# Altium PCB PCB1.PcbDoc
Units mm, origin at the board's own origin, x right, y up, seen from the top; angles counter-clockwise.
Board outline 208.9 x 118.98 mm, 2 copper layers (Top Layer, Bottom Layer); 105 components, 65 nets, 338 pads, 41 vias.
Unrouted connection lines stored in the file: 29.
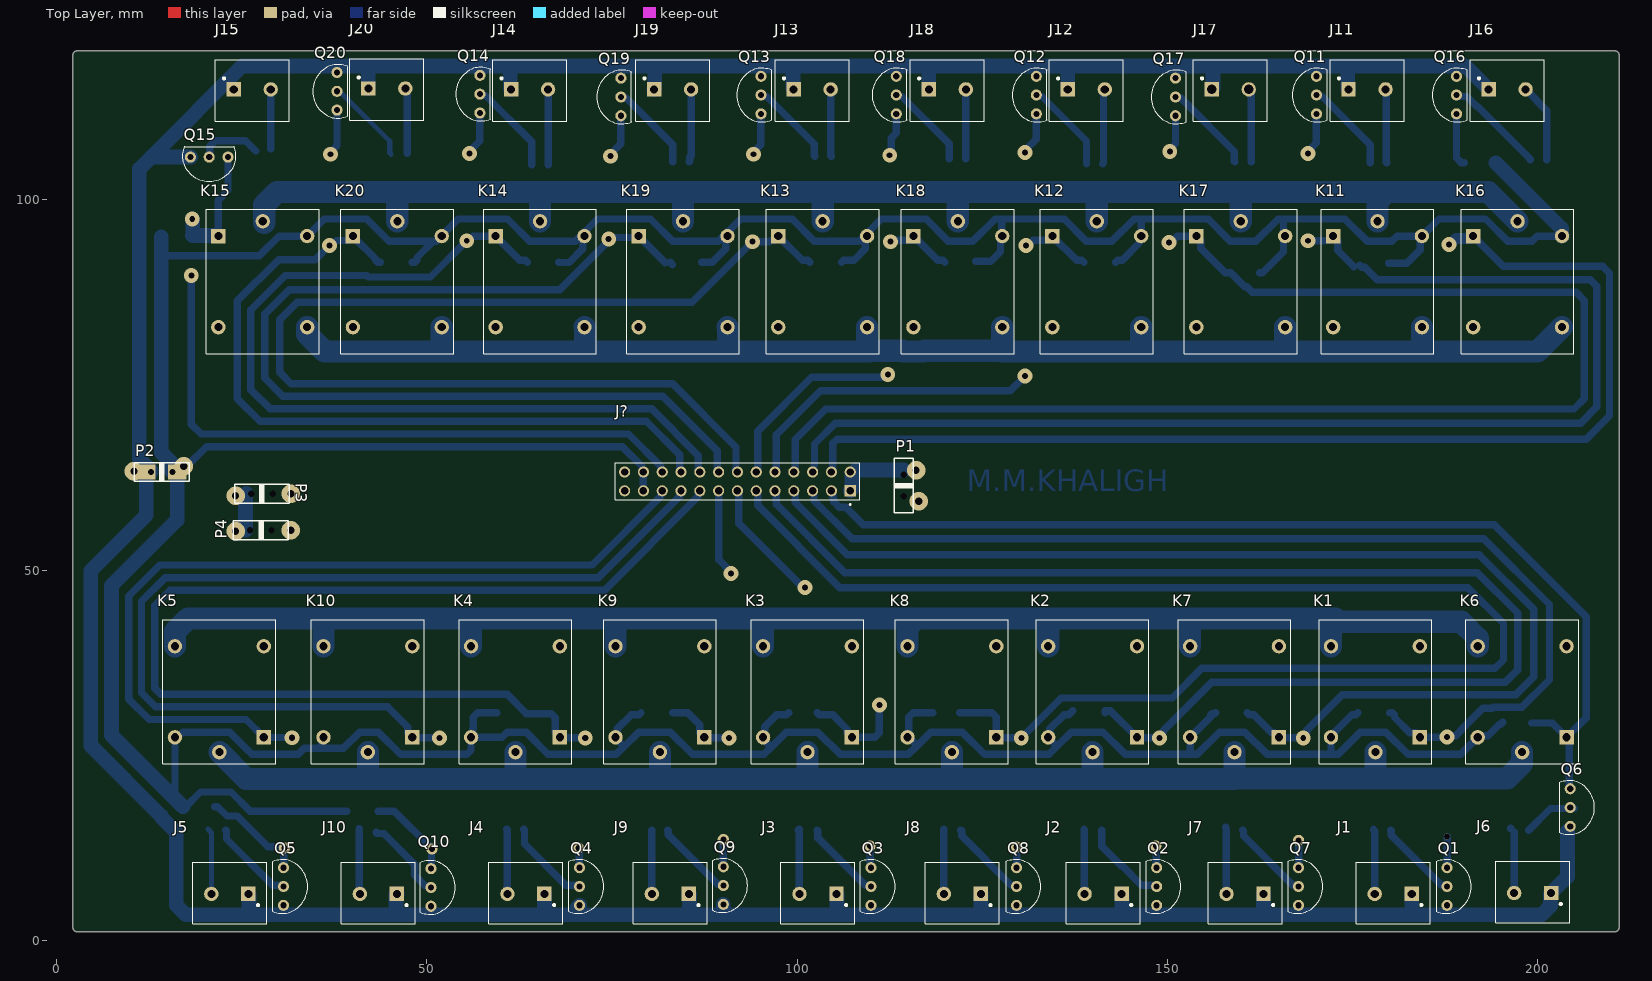
[diagram p0: Top Layer view]
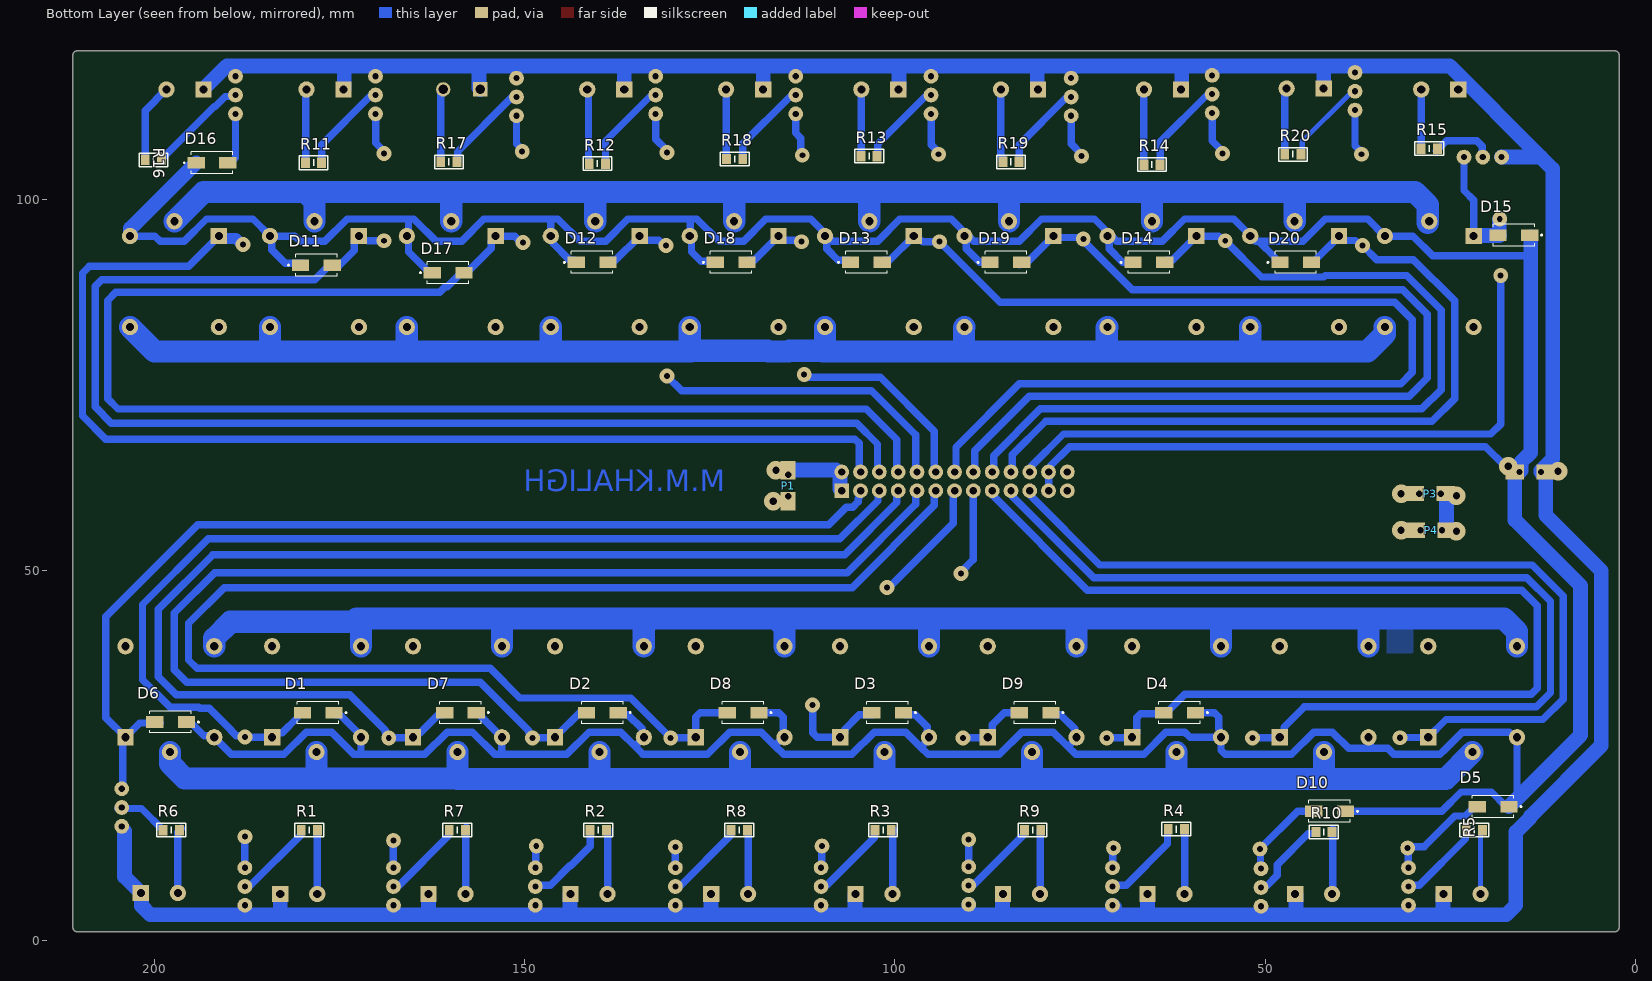
[diagram p1: Bottom Layer view, seen from below]
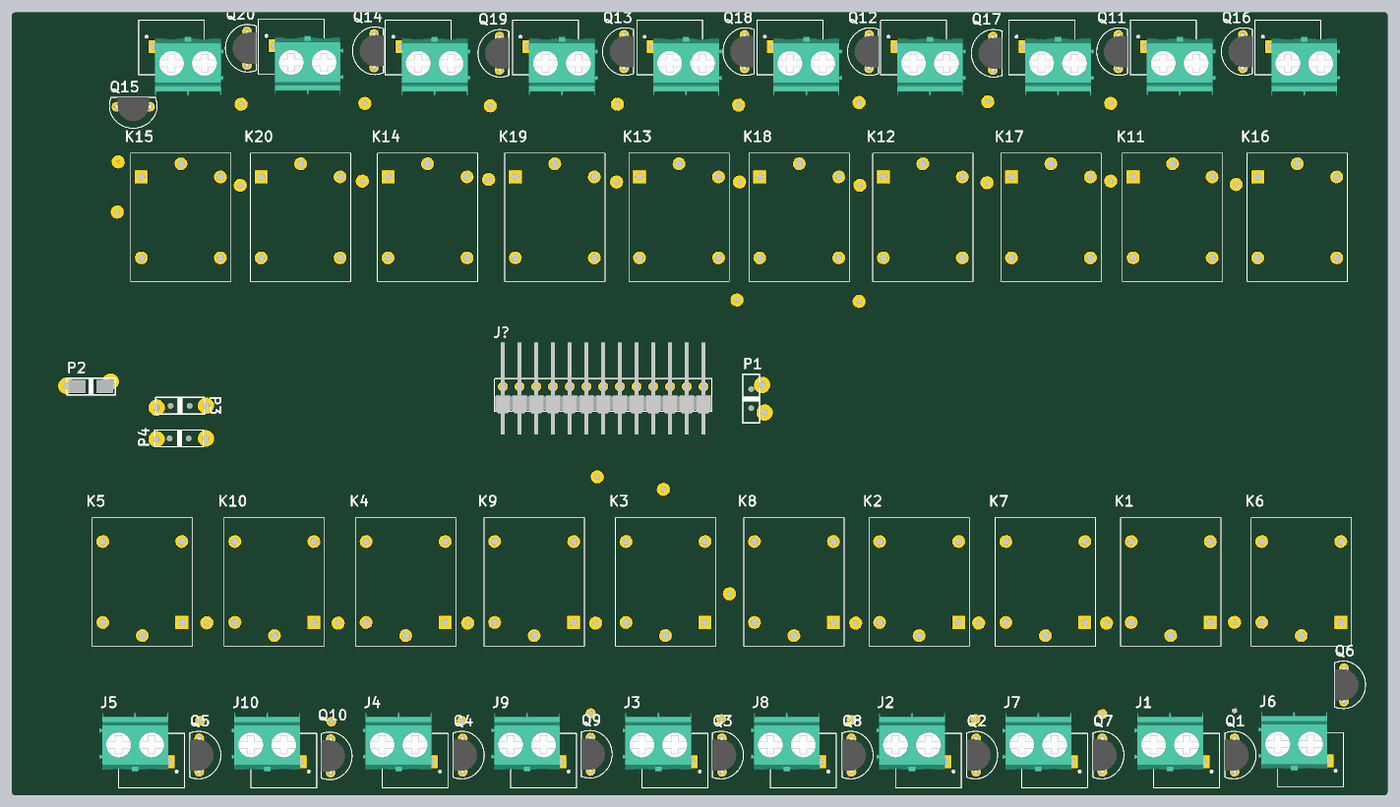
[diagram p2: 3D render of the assembled board from above, using the file's embedded part models]
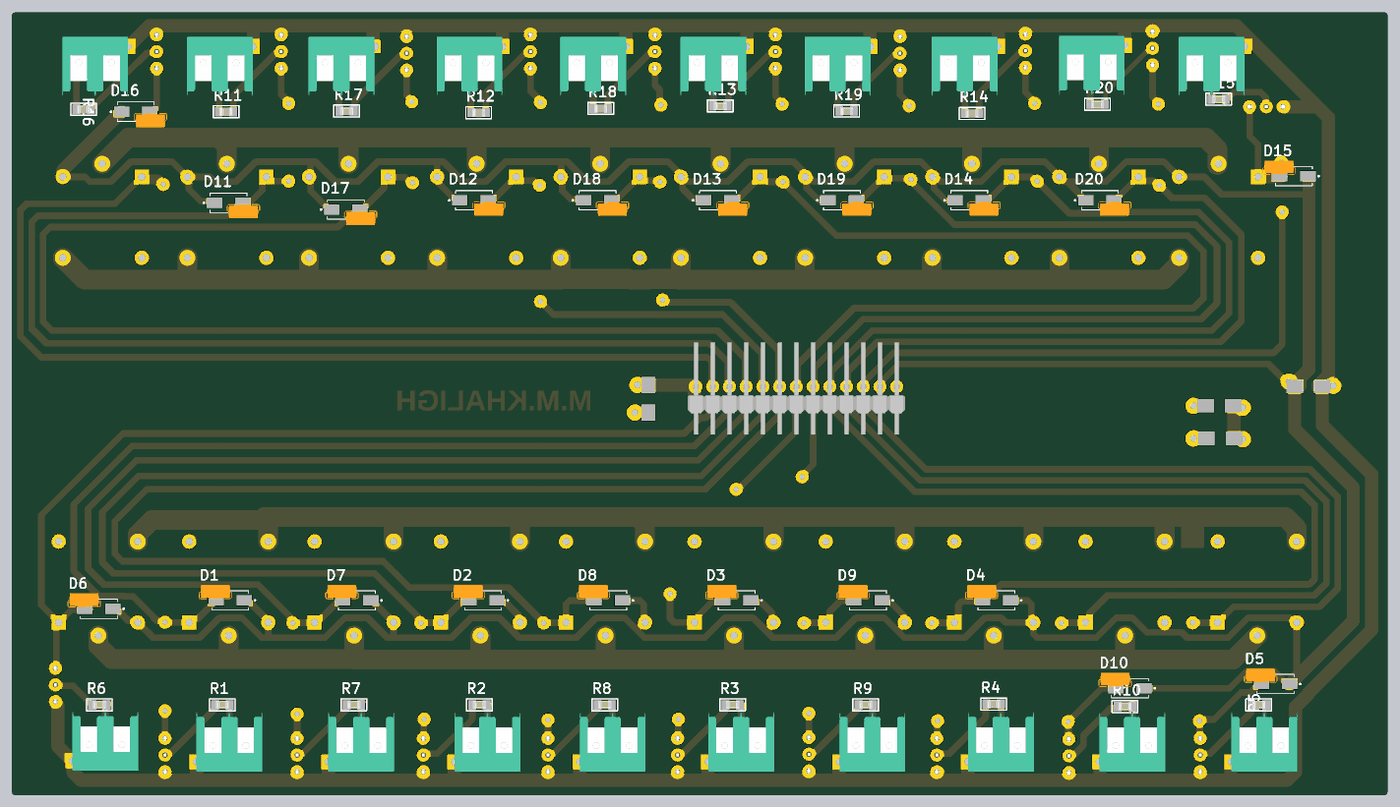
[diagram p3: 3D render of the assembled board from below, using the file's embedded part models]

## Layer stack, top to bottom
Top Solder: solder mask 0.0102, Solder Resist, Dk 3.5
Top Layer: signal copper 0.0356
Dielectric 1: dielectric 0.32, FR-4, Dk 4.8
Bottom Layer: signal copper 0.0356
Bottom Solder: solder mask 0.0102, Solder Resist, Dk 3.5

## Board outline
2.167,1.651 ccw(c2.667,1.651) 2.667,1.151 210.566,1.151 ccw(c210.566,1.651) 211.066,1.651 211.066,119.634 ccw(c210.566,119.634) 210.566,120.134 2.667,120.134 ccw(c2.667,119.634) 2.167,119.634

## Design rules (kind name [scope] priority, off if disabled: settings)
Clearance Clearance_2 [All] p1: gap=0.7 ignorepadtopadclearanceinfootprint=FALSE
Clearance Clearance_1 [All] p2: gap=0.711 ignorepadtopadclearanceinfootprint=TRUE
Clearance [All] p3: gap=0.254 ignorepadtopadclearanceinfootprint=TRUE
DiffPairsRouting [All] p1: maxlimit=1.27 minlimit=0.508 mostfreqgap=1.016 toplayer_minwidth=0.635 toplayer_maxwidth=1.27 toplayer_prefwidth=1.016 bottomlayer_minwidth=0.635 bottomlayer_maxwidth=1.27 bottomlayer_prefwidth=1.016 maxuncoupledlength=12.7
PolygonConnect [All] p1: connectstyle=Relief reliefconductorwidth=0.254 reliefentries=4 polygonreliefangle="90 Angle" airgapwidth=0.254
RoutingVias [All] p1: holewidth=0.8 width=2 viastyle="Through Hole" minholewidth=0.8 minwidth=2 maxholewidth=0.8 maxwidth=2
SolderMaskExpansion [All] p1: expansion=0.102 istentingtop=FALSE
UnpouredPolygon [All] p1: allowshelved=TRUE
Width [All] p1: maxlimit=3 minlimit=0.7 preferedwidth=1 minimp=50.000000 maximp=50.000000 favimp=50.000000
28 further rules are at their usual default settings.

## Components (designator, comment, footprint, x,y, rotation, side; value= is the part's Value field where it differs from the comment)
D1 "S1M" DIOM5227X270N 177.927,30.734 r0 bottom
D2 "S1M" DIOM5227X270N 139.523,30.734 r0 bottom
D3 "S1M" DIOM5227X270N 101.002,30.734 r0 bottom
D4 "S1M" DIOM5227X270N 61.545,30.734 r0 bottom
D5 "S1M" DIOM5227X270N 19.177,18.034 r0 bottom
D6 "S1M" DIOM5227X270N 197.866,29.464 r0 bottom
D7 "S1M" DIOM5227X270N 158.7,30.734 r0 bottom
D8 "S1M" DIOM5227X270N 120.513,30.734 r0 bottom
D9 "S1M" DIOM5227X270N 81.063,30.734 r0 bottom
D10 "S1M" DIOM5227X270N 41.275,17.399 r0 bottom
D11 "S1M" DIOM5227X270N 178.181,91.186 r180 bottom
D12 "S1M" DIOM5227X270N 140.911,91.567 r180 bottom
D13 "S1M" DIOM5227X270N 103.874,91.567 r180 bottom
D14 "S1M" DIOM5227X270N 65.687,91.567 r180 bottom
D15 "S1M" DIOM5227X270N 16.383,95.25 r0 bottom
D16 "S1M" DIOM5227X270N 192.278,105.029 r180 bottom
D17 "S1M" DIOM5227X270N 160.364,90.17 r180 bottom
D18 "S1M" DIOM5227X270N 122.137,91.567 r180 bottom
D19 "S1M" DIOM5227X270N 85.013,91.567 r180 bottom
D20 "S1M" DIOM5227X270N 45.847,91.567 r180 bottom
J1 "terminal" PHOENIX_1935161#1 180.554,6.231 r180 top
J2 "terminal" PHOENIX_1935161#1 141.351,6.231 r180 top
J3 "terminal" PHOENIX_1935161#1 102.83,6.231 r180 top
J4 "terminal" PHOENIX_1935161#1 63.373,6.231 r180 top
J5 "terminal" PHOENIX_1935161#1 23.368,6.231 r180 top
J6 "terminal" PHOENIX_1935161#1 199.39,6.358 r180 top
J7 "terminal" PHOENIX_1935161#1 160.528,6.231 r180 top
J8 "terminal" PHOENIX_1935161#1 122.341,6.231 r180 top
J9 "terminal" PHOENIX_1935161#1 82.891,6.231 r180 top
J10 "terminal" PHOENIX_1935161#1 43.434,6.231 r180 top
J11 "terminal" PHOENIX_1935161#1 177.015,114.935 r0 top
J12 "terminal" PHOENIX_1935161#1 139.082,114.935 r0 top
J13 "terminal" PHOENIX_1935161#1 102.045,114.935 r0 top
J14 "terminal" PHOENIX_1935161#1 63.858,114.935 r0 top
J15 "terminal" PHOENIX_1935161#1 26.393,114.935 r0 top
J16 "terminal" PHOENIX_1935161#1 195.938,114.935 r0 top
J17 "terminal" PHOENIX_1935161#2 158.536,114.935 r0 top
J18 "terminal" PHOENIX_1935161#1 120.309,114.935 r0 top
J19 "terminal" PHOENIX_1935161#1 83.185,114.935 r0 top
J20 "terminal" PHOENIX_1935161#1 44.577,115.062 r0 top
J? "1-826658-3" TE_1-826658-3 91.948,61.976 r180 top
K1 "JQC-3F-_T73_-1Z-12VDC" JQC3FT731Z12VDC#1 184.15,27.4 r90 top
K2 "JQC-3F-_T73_-1Z-12VDC" JQC3FT731Z12VDC#1 145.933,27.4 r90 top
K3 "JQC-3F-_T73_-1Z-12VDC" JQC3FT731Z12VDC#1 107.412,27.4 r90 top
K4 "JQC-3F-_T73_-1Z-12VDC" JQC3FT731Z12VDC#1 67.955,27.4 r90 top
K5 "JQC-3F-_T73_-1Z-12VDC" JQC3FT731Z12VDC#1 27.95,27.4 r90 top
K6 "JQC-3F-_T73_-1Z-12VDC" JQC3FT731Z12VDC#1 203.972,27.4 r90 top
K7 "JQC-3F-_T73_-1Z-12VDC" JQC3FT731Z12VDC#1 165.11,27.4 r90 top
K8 "JQC-3F-_T73_-1Z-12VDC" JQC3FT731Z12VDC#1 126.923,27.4 r90 top
K9 "JQC-3F-_T73_-1Z-12VDC" JQC3FT731Z12VDC#1 87.473,27.4 r90 top
K10 "JQC-3F-_T73_-1Z-12VDC" JQC3FT731Z12VDC#2 48.016,27.4 r90 top
K11 "JQC-3F-_T73_-1Z-12VDC" JQC3FT731Z12VDC#2 172.434,95.123 r270 top
K12 "JQC-3F-_T73_-1Z-12VDC" JQC3FT731Z12VDC#1 134.501,95.123 r270 top
K13 "JQC-3F-_T73_-1Z-12VDC" JQC3FT731Z12VDC#1 97.464,95.123 r270 top
K14 "JQC-3F-_T73_-1Z-12VDC" JQC3FT731Z12VDC#1 59.277,95.123 r270 top
K15 "JQC-3F-_T73_-1Z-12VDC" JQC3FT731Z12VDC#1 21.812,95.123 r270 top
K16 "JQC-3F-_T73_-1Z-12VDC" JQC3FT731Z12VDC#1 191.357,95.123 r270 top
K17 "JQC-3F-_T73_-1Z-12VDC" JQC3FT731Z12VDC#1 153.954,95.123 r270 top
K18 "JQC-3F-_T73_-1Z-12VDC" JQC3FT731Z12VDC#1 115.727,95.123 r270 top
K19 "JQC-3F-_T73_-1Z-12VDC" JQC3FT731Z12VDC#1 78.603,95.123 r270 top
K20 "JQC-3F-_T73_-1Z-12VDC" JQC3FT731Z12VDC#1 39.995,95.123 r270 top
P1 "24v" "HDR1X2_SMD - THD"#1 114.427,61.404 r90 top
P2 "24v" "HDR1X2_SMD - THD"#2 14.16,63.246 r0 top
P3 "AC 220" "HDR1X2_SMD - THD"#3 27.686,60.325 r0 top
P4 "BUZZER" "HDR1X2_SMD - THD"#4 27.559,55.372 r180 top
Q1 "BC547" TO92 187.833,7.239 r270 top
Q2 "BC547" TO92 148.59,7.239 r270 top
Q3 "BC547" TO92 109.982,7.239 r270 top
Q4 "BC547" TO92 70.612,7.239 r270 top
Q5 "BC547" TO92 30.607,7.239 r270 top
Q6 "BC547" TO92 204.47,17.907 r270 top
Q7 "BC547" TO92 167.767,7.239 r270 top
Q8 "BC547" TO92 129.667,7.239 r270 top
Q9 "BC547" TO92 90.043,7.366 r270 top
Q10 "BC547" TO92 50.546,7.112 r270 top
Q11 "BC547" TO92 170.18,114.173 r90 top
Q12 "BC547" TO92 132.334,114.173 r90 top
Q13 "BC547" TO92 95.123,114.173 r90 top
Q14 "BC547" TO92 57.15,114.3 r90 top
Q15 "BC547" TO92 20.574,105.791 r180 top
Q16 "BC547" TO92 189.103,114.173 r90 top
Q17 "BC547" TO92 151.13,113.919 r90 top
Q18 "BC547" TO92 113.411,114.173 r90 top
Q19 "BC547" TO92 76.2,113.919 r90 top
Q20 "BC547" TO92 37.846,114.681 r90 top
R1 "1k" "0805 - CAP - duplicate" 179.113,14.859 r180 bottom value=10k
R2 "1k" "0805 - CAP - duplicate" 140.081,14.859 r180 bottom value=10k
R3 "1k" "0805 - CAP - duplicate" 101.6,14.859 r180 bottom value=10k
R4 "1k" "0805 - CAP - duplicate" 61.976,14.986 r180 bottom value=10k
R5 "1k" "0805 - CAP - duplicate" 21.717,14.859 r180 bottom value=10k
R6 "1k" "0805 - CAP - duplicate" 197.782,14.859 r180 bottom value=10k
R7 "1k" "0805 - CAP - duplicate" 159.131,14.859 r180 bottom value=10k
R8 "1k" "0805 - CAP - duplicate" 121.031,14.859 r180 bottom value=10k
R9 "1k" "0805 - CAP - duplicate" 81.407,14.859 r180 bottom value=10k
R10 "1k" "0805 - CAP - duplicate" 42.037,14.605 r180 bottom value=10k
R11 "1k" "0805 - CAP - duplicate" 178.562,105.029 r0 bottom value=10k
R12 "1k" "0805 - CAP - duplicate" 140.208,104.902 r0 bottom value=10k
R13 "1k" "0805 - CAP - duplicate" 103.505,105.918 r0 bottom value=10k
R14 "1k" "0805 - CAP - duplicate" 65.278,104.775 r0 bottom value=10k
R15 "1k" "0805 - CAP - duplicate" 27.813,106.934 r0 bottom value=10k
R16 "1k" "0805 - CAP - duplicate" 200.195,105.41 r0 bottom value=10k
R17 "1k" "0805 - CAP - duplicate" 160.274,105.156 r0 bottom value=10k
R18 "1k" "0805 - CAP - duplicate" 121.666,105.537 r0 bottom value=10k
R19 "1k" "0805 - CAP - duplicate" 84.328,105.156 r0 bottom value=10k
R20 "1k" "0805 - CAP - duplicate" 46.228,106.172 r0 bottom value=10k

## Footprints (in the part's own frame and the unit in brackets; to place one, negate y for a bottom-side part, rotate by r counter-clockwise, add the part's x,y. Pads: shape width x height; smd on the part's side, far side on the other; paste and mask are expansions set on the pad)
"0805 - CAP - duplicate" [mm]
  rect 1.2x1.4 smd: 1(-1.1,0) 2(1.1,0)
  silkscreen extent -1.96,-0.91 1.93,0.91, body extent -1.01,-0.6 0.99,0.65, height 0.3
DIOM5227X270N [mm]
  rect 2.33x1.56 smd: A(2.14,0) C(-2.14,0)
  silkscreen extent -3.85,-1.47 2.8,1.47, body extent -0.28,-2.37 4.77,-0.2, height 2.45
"HDR1X2_SMD - THD"#1 [mil]
  rect 98.43x80 smd far side: 1(-82.5,0) 1(-82.5,0) 2(82.5,0) 2(82.5,0)
  round 0 hole 33.46: 1(-56.5,0) 2(57.51,0)
  silkscreen extent -145,-51 146,51
"HDR1X2_SMD - THD"#2 [mil]
  rect 98.43x80 smd far side: 1(-82.5,0) 2(82.5,0)
  rect 98.43x80 smd: 1(-82.5,0) 2(82.5,0)
  round 0 hole 33.46: 1(-56.5,0) 2(57.51,0)
  silkscreen extent -145,-51 146,51
"HDR1X2_SMD - THD"#3 [mil]
  rect 98.43x80 smd far side: 1(-82.5,0)
  rect 0x80 smd far side: 1(-82.5,0)
  round 0 hole 33.46: 1(-56.5,0)
  oval 0x86.61 hole 33.46 paste+0: 2(57.51,0)
  rect 98.43x80 smd far side paste+0: 2(82.5,0) 2(82.5,0)
  silkscreen extent -145,-51 146,51
"HDR1X2_SMD - THD"#4 [mil]
  rect 98.43x80 smd far side: 1(-82.5,0) 2(82.5,0) 2(82.5,0) ""(-82.5,0)
  round 0 hole 33.46: 2(57.51,0) ""(-56.5,0)
  silkscreen extent -145,-51 146,51
JQC3FT731Z12VDC#1 [mm]
  rect 1.95x1.95 / inner rect 1.95x1.95 / far side rect 2.2x2.2 hole 1.1 unplated: 1(0,0)
  round 1.95 / inner round 1.95 / far side round 2.2 hole 1.1 unplated: 2(12.3,0) 4(0,12) 5(-2,6)
  round 1.95 / inner round 1.95 / far side round 2.2 hole 1.1 unplated paste+0.762: 3(12.3,12)
  silkscreen extent -3.6,-1.62 15.9,13.62
JQC3FT731Z12VDC#2 [mm]
  rect 1.95x1.95 / inner rect 1.95x1.95 / far side rect 2.2x2.2 hole 1.1 unplated: 1(0,0)
  round 1.95 / inner round 1.95 / far side round 2.2 hole 1.1 unplated: 2(12.3,0) 3(12.3,12) 4(0,12) 5(-2,6)
  silkscreen extent -3.6,-1.62 15.9,13.62
PHOENIX_1935161#1 [mm]
  rect 1.95x1.95 / inner rect 1.95x1.95 / far side rect 2.2x2.2 hole 1.1 unplated: 1(-2.5,0)
  round 1.95 / inner round 1.95 / far side round 2.2 hole 1.1 unplated: 2(2.5,0)
  silkscreen extent -5,-4.3 5,4, body extent -2.5,-7.5 7.9,1.5, height 5.7
PHOENIX_1935161#2 [mm]
  rect 1.95x1.95 / inner round 1.95 / far side rect 1.95x1.95 hole 1.3: 1(-2.5,0)
  round 1.95 hole 1.3: 2(2.5,0)
  silkscreen extent -5,-4.3 5,4, body extent -2.5,-7.5 7.9,1.5, height 5.7
TE_1-826658-3 [mm]
  rect 1.508x1.508 / inner rect 1.508x1.508 / far side rect 2x2 hole 1: 1(-15.24,1.27)
  round 1.508 / inner round 1.508 / far side round 2 hole 1: 2(-12.7,1.27) 3(-10.16,1.27) 4(-7.62,1.27) 5(-5.08,1.27) 6(-2.54,1.27) 7(0,1.27) 8(2.54,1.27) 9(5.08,1.27) 10(7.62,1.27) 11(10.16,1.27) 12(12.7,1.27) 13(15.24,1.27) 14(-15.24,-1.27) 15(-12.7,-1.27) 16(-10.16,-1.27) 17(-7.62,-1.27) 18(-5.08,-1.27) 19(-2.54,-1.27) 20(0,-1.27) 21(2.54,-1.27) 22(5.08,-1.27) 23(7.62,-1.27) 24(10.16,-1.27) 25(12.7,-1.27) 26(15.24,-1.27)
  silkscreen extent -16.51,-2.5 16.51,3.2, body extent -16.51,-8 16.51,6, height 2.5
TO92 [mm]
  round 1.5 / inner round 1.5 / far side round 2 hole 0.831: 1(-2.54,0) 2(0,0) 3(2.54,0)
  silkscreen extent -3.62,-1.46 3.62,3.27, body extent -2.83,-1.43 2.83,2.19, height 8.77

## Part data
D1 D2 D3 D4 D5 D6 D7 D8 D9 D10 D11 D12 D13 D14 D15 D16 D17 D18 D19 D20: "Diode Standard 1000 V 1A Surface Mount DO-214AC (SMA)", Package="DO-214AC-2 Diotec", Availability="In Stock", Check_prices=https://www.snapeda.com/parts/S1M/Diotec/view-part/?ref=eda, MF="Diotec Semiconductor", MP=S1M, Price=None, Purchase-URL=https://pricing.snapeda.com/search/part/S1M/?ref=eda, SnapEDA_Link=https://www.snapeda.com/parts/S1M/Diotec/view-part/?ref=snap
J1 J2 J3 J4 J5 J6 J7 J8 J9 J10 J11 J12 J13 J14 J15 J16 J17 J18 J19 J20: library part TB008A-508-02BE, "Fixed Terminal Blocks screw type, 5.08 , 45 , 2 poles, CUI Blue, slotted screw, PCB mount", Manufacturer_Name="CUI Devices", Mouser Part Number=490-TB008A-508-02BE, Arrow Part Number=TB008A-508-02BE, Arrow Price/Stock=https://www.arrow.com/en/products/tb008a-508-02be/cui-devices?region=nac, Datasheet Link=https://componentsearchengine.com/Datasheets/1/TB008A-508-02BE.pdf, Geometry.Height=15.82mm, Manufacturer_Part_Number=TB008A-508-02BE, Mouser Price/Stock=https://www.mouser.co.uk/ProductDetail/CUI-Devices/TB008A-508-02BE?qs=vLWxofP3U2w5I2Hxj8y2hQ%3D%3D
J?: "AMPMODU II PIN HEADER 2X13P", Package=None, Availability=Warning, Centerline_Pitch="2.54 mm[.1 in]", Check_prices=https://www.snapeda.com/parts/1-826658-3/TE%20Connectivity%20AMP%20Connectors/view-part/1429931/?ref=eda, EU_RoHS_Compliance=Compliant, MF="TE Connectivity", MP=1-826658-3, Number_of_Positions=26, Price=None, Product_Type=Connector, SnapEDA_Link=https://www.snapeda.com/parts/1-826658-3/TE%20Connectivity%20AMP%20Connectors/view-part/1429931/?ref=snap
K1 K2 K3 K4 K5 K6 K7 K8 K9 K10 K11 K12 K13 K14 K15 K16 K17 K18 K19 K20: "RELAY POWER 10A 12VDC 1C PCB TYPE (JS1) 5PIN QIANJ", Manufacturer_Name=QIANJI, Manufacturer_Part_Number=JQC-3F-(T73)-1Z-12VDC, Datasheet Link=https://img.ozdisan.com/ETicaret_Dosya/341245_8627675.pdf, Geometry.Height=15.5mm
P1 P2 P3 P4: library part "Header 2", "Header, 2-Pin", LatestRevisionDate=17-Jul-2002, LatestRevisionNote="Re-released for DXP Platform.", Publisher="Altium Limited"
Q1 Q2 Q3 Q4 Q5 Q6 Q7 Q8 Q9 Q10 Q11 Q12 Q13 Q14 Q15 Q16 Q17 Q18 Q19 Q20: "Trans GP BJT NPN 45V 0.1A 500mW 3-Pin TO-92 T/R", Package=None, Availability="In Stock", Check_prices=https://www.snapeda.com/parts/BC547/Onsemi/view-part/?ref=eda, MF="ON Semiconductor", MP=BC547, Price=None, SnapEDA_Link=https://www.snapeda.com/parts/BC547/Onsemi/view-part/?ref=snap
R1 R2 R3 R4 R5 R6 R7 R8 R9 R10 R11 R12 R13 R14 R15 R16 R17 R18 R19 R20: library part Res1, "Resistor", LatestRevisionDate=17-Jul-2002, LatestRevisionNote="Re-released for DXP Platform.", PackageDescription="Axial Device, Thru-Hole; 2 Leads; 0.3 in Pin Spacing", PackageReference=AXIAL-0.3, Published=8-Jun-2000, Publisher="Altium Limited"

## Free pads (board coordinates)
  round 1.524 / inner round 1.524 / far side round 2 hole 0.8: 2(167.767,13.462) 4(148.463,12.7) 5(129.667,12.573) 6(109.855,12.7) 7(90.043,13.589) 8(70.485,12.446) 9(50.673,12.319) 10(30.734,12.446)

## Via types
v1: diameter 2, hole 0.8, Top Layer to Bottom Layer, 28 vias
v2: diameter 2.5, hole 1, Top Layer to Bottom Layer, 8 vias
v3: diameter 2, hole 0.85, Top Layer to Bottom Layer, 4 vias
v4: diameter 0.8/2 (per signal layer), hole 0.8, Top Layer to Bottom Layer, 1 vias

## Nets (pads, with @x,y where several pads share a name; then routed paths per layer and width w, separated by ;. In a path a pad name is that pad's centre, name@x,y a point inside that pad or via, vN(x,y) a via of type N, cw(c..) or ccw(c..) an arc to the next point about the centre after c; other vN are vias at no path point)
1: D1.A J?.3 K1.1 Q1.1 | length 147.4
  Bottom Layer w1: J?.3 102.299,60.515 102.299,59.372 107.442,54.229 192.786,54.229 201.672,45.343 201.672,35.175 197.941,31.444 194.064,31.444 193.969,31.349 192.668,31.349 189.672,28.353 189.672,28.3 188.995,27.623 188.024,27.623 v1(187.833,27.432) 187.817,27.416 184.166,27.416 K1.1 183.55,28 182.801,28 180.732,30.069 180.732,30.454 180.452,30.734 D1.A ; Q1.1 v4(187.833,13.97)
2: D2.A J?.5 K2.1 pad.4 Q2.1 | length 180.4
  Bottom Layer w1: J?.5 97.219,60.515 97.219,58.864 106.426,49.657 191.897,49.657 197.358,44.196 197.358,36.536 195.669,34.847 156.015,34.847 149.471,28.303 149.471,28.076 148.971,27.576 v1(148.971,27.305) 148.924,27.352 145.98,27.352 K2.1 142.328,31.005 141.663,31.005 D2.A ; pad.4 148.526,12.636 148.526,9.842 Q2.1
3: D3.A J?.7 K3.1 pad.6 Q3.1 | length 34
  Bottom Layer w1: J?.7 92.139,60.515 92.139,56.324 100.838,47.625 v1(101.092,47.625) ; D3.A@102.743,30.734 103.023,30.454 104.801,30.454 106.812,28.443 106.812,28 K3.1 107.428,27.416 110.539,27.416 111.125,28.002 v1(111.125,31.75) ; pad.6 109.918,12.636 109.918,9.842 Q3.1
4: D4.A J?.9 K4.1 pad.8 Q4.1 | length 156.4
  Bottom Layer w1: pad.8 70.549,12.383 70.549,9.842 Q4.1 ; v3(71.374,27.305) 71.327,27.352 68.002,27.352 67.355,28 67.355,30.021 66.769,30.607 63.427,30.607 60.834,33.2 14.035,33.2 13.208,34.027 13.208,45.157 15.324,47.273 74.006,47.273 86.677,59.943 86.677,60.515 J?.9
5: D5.A J?.11 K5.1 pad.10 Q5.1 | length 130.9
  Bottom Layer w1: D5.A 21.702,18.034 22.977,16.759 24.368,16.759 28.49,12.637 30.543,12.637 pad.10 30.67,12.383 30.67,9.842 Q5.1 ; v3(31.75,27.346) 31.723,27.373 28.023,27.373 28,27.35 25.55,29.8 12.491,29.8 9.731,32.56 9.731,46.489 13.915,50.673 72.326,50.673 81.597,59.943 81.597,60.515 J?.11
6: D6.A J?.2 K6.1 Q6.1 | length 139.9
  Bottom Layer w1: J?.2 104.839,60.515 104.839,59.808 104.988,59.659 104.988,59.209 105.691,58.506 106.594,58.506 108.966,56.134 194.183,56.134 206.629,43.688 206.629,30.057 K6.1 ; D6.A@199.28,29.337 202.035,29.337 K6.1 ; Q6.1@204.587,20.33 204.343,20.574 204.343,27.029 K6.1
7: D7.A J?.4 K7.1 pad.2 Q7.1 | length 164.1
  Bottom Layer w1: J?.4 99.759,60.515 99.759,59.118 106.807,52.07 192.151,52.07 199.517,44.704 199.517,35.56 197.104,33.147 173.669,33.147 168.88,28.358 168.88,28.048 168.402,27.571 v1(168.402,27.3) 168.352,27.35 165.16,27.35 164.51,28 164.151,28 161.697,30.454 161.12,30.454 D7.A ; Q7.1 pad.2
8: D8.A J?.6 K8.1 pad.5 Q8.1 | length 198
  Bottom Layer w1: J?.6 94.679,60.515 94.679,58.737 105.791,47.625 190.627,47.625 195.453,42.799 195.453,37.846 194.31,36.703 154.686,36.703 150.697,32.714 135.721,32.714 v1@130.312,27.305 ; D8.A@121.977,30.734 126.337,30.734 126.923,30.148 K8.1 126.97,27.352 130.255,27.352 v1(130.302,27.305) ; Q8.1 pad.5
9: D9.A J?.8 K9.1 pad.7 Q9.1 | length 25.2
  Bottom Layer w1: D9.A 83.229,30.708 85.243,30.708 86.873,29.078 86.873,28 87.523,27.35 90.755,27.35 v3(90.805,27.3) ; J?.8 89.408,51.415 91.059,49.764 v1(91.059,49.53) ; Q9.1 pad.7
10: D10.A J?.10 K10.1 pad.9 Q10.1 | length 147.1
  Bottom Layer w1: D10.A 45.593,17.399 pad.9 50.609,12.255 50.609,9.716 Q10.1 ; K10.1 47.416,28 47.416,28.784 44.7,31.5 13.331,31.5 11.431,33.4 11.431,45.785 14.619,48.973 73.166,48.973 84.137,59.943 84.137,60.515 J?.10 ; K10.1@48.066,27.35 51.639,27.35 v3(51.689,27.3)
11: D11.A J?.16 K11.1 Q11.1 | length 175.9
  Bottom Layer w1: J?.16 102.299,63.437 102.299,64.144 102.362,64.207 102.362,67.032 105.18,69.85 205.867,69.85 208.075,72.058 208.075,88.317 207.186,89.206 178.406,89.206 176.706,90.906 176.321,90.906 D11.A ; v1(169.037,94.488) 171.248,94.488 171.283,94.523 171.834,94.523 K11.1 173.034,94.523 173.034,93.173 D11.A@175.204,91.003 ; v1(169.037,106.299) 169.037,106.57 170.18,107.713 Q11.1
12: D12.A J?.18 K12.1 Q12.1 | length 57.6
  Bottom Layer w1: J?.18 97.219,63.437 97.219,68.263 103.171,74.215 128.825,74.215 v1(130.81,76.2) ; v1(130.81,106.426) 130.81,106.697 132.334,108.221 Q12.1 ; v1(130.937,93.853) 131.208,93.853 131.901,94.546 133.924,94.546 K12.1 137.777,91.847 138.491,91.847 D12.A
13: D13.A J?.20 K13.1 Q13.1 | length 159.7
  Bottom Layer w1: J?.20@91.621,63.573 91.757,63.708 91.757,66.612 83.194,75.175 31.632,75.175 30.099,76.708 30.099,83.82 32.466,86.187 85.806,86.187 v1(93.98,94.361) 96.278,94.361 96.44,94.523 96.864,94.523 K13.1 100.74,91.847 101.454,91.847 D13.A ; v1(94.107,106.172) 94.107,106.443 95.123,107.459 Q13.1
14: D14.A J?.22 K14.1 Q14.1 | length 126.4
  Bottom Layer w1: v1(55.753,106.299) 55.753,106.57 57.15,107.967 Q14.1 ; D14.A 63.267,91.847 62.553,91.847 K14.1 56.278,95.123 55.643,94.488 v1(55.372,94.488) 50.471,89.587 42.045,89.587 41.843,89.789 30.861,89.789 26.211,85.139 26.211,74.373 28.809,71.775 80.362,71.775 86.677,65.461 86.677,63.437 J?.22
15: D15.A J?.24 K15.1 Q15.1 | length 103.8
  Bottom Layer w1: v1(18.161,89.789) 18.161,69.691 19.477,68.375 77.23,68.375 81.597,64.009 81.597,63.437 J?.24 ; K15.1 21.812,99.97 23.114,101.273 Q15.1
  Bottom Layer w2: v1(18.288,97.409) 18.358,97.339 18.358,95.415 D15.A@18.587,95.186 ; D15.A@18.333,95.186 21.748,95.186 K15.1
16: D16.A J?.15 K16.1 Q16.1 | length 161.2
  Bottom Layer w1: J?.15 104.839,63.437 104.839,67.105 105.425,67.691 206.629,67.691 209.775,70.837 209.775,90.121 208.837,91.059 195.421,91.059 K16.1 ; Q16.1 189.103,105.679 189.753,105.029 D16.A
  Bottom Layer w1.5: v1(188.087,93.98) 188.222,93.98 189.015,94.773 191.007,94.773 K16.1
17: D17.A J?.17 K17.1 Q17.1 | length 192.5
  Bottom Layer w1: J?.17 99.759,63.437 99.759,67.628 103.886,71.755 204.978,71.755 206.375,73.152 206.375,86.412 205.281,87.506 161.526,87.506 160.767,88.265 160.514,88.265 158.609,90.17 D17.A 157.839,90.17 154.554,93.455 154.554,94.523 K17.1 153.908,95.077 151.354,95.077 150.512,94.234 v1(150.241,94.234) ; v1(150.368,106.553) 150.368,106.824 151.13,107.586 Q17.1
18: D18.A J?.19 K18.1 Q18.1 | length 41
  Bottom Layer w1: J?.19 94.679,63.437 94.679,68.771 101.981,76.073 111.655,76.073 111.997,76.415 v1(112.268,76.415) ; v1(112.522,106.045) 112.713,106.236 112.713,108.347 113.411,109.045 Q18.1 ; v1(112.649,94.361) 112.84,94.552 116.298,94.552 119.003,91.847 119.717,91.847 D18.A
19: D19.A J?.21 K19.1 Q19.1 | length 143.4
  Bottom Layer w1: v1(74.803,105.918) 74.803,106.189 76.2,107.586 Q19.1 ; D19.A@82.208,91.518 K19.1 78.413,94.932 74.739,94.932 v1(74.549,94.742) 74.549,94.488 67.948,87.887 31.372,87.887 28.067,84.582 28.067,75.946 30.538,73.475 81.846,73.475 89.217,66.104 89.217,63.437 J?.21 ; D19.A D19.A@83.175,91.265
20: D20.A J?.23 K20.1 Q20.1 | length 109.4
  Bottom Layer w1: v1(36.957,106.172) 36.957,106.443 37.846,107.332 Q20.1 ; D20.A 43.322,91.567 43.042,91.847 43.042,92.076 K20.1 39.395,94.523 37.771,94.523 37.101,93.853 v1(36.83,93.853) 34.925,91.948 29.972,91.948 24.384,86.36 24.384,73.152 27.461,70.075 79.658,70.075 84.137,65.596 84.137,63.437 J?.23
24V: D1.C D2.C D3.C D4.C D5.C D6.C D7.C D8.C D9.C D10.C D11.C D12.C D13.C D14.C D15.C D16.C D17.C D18.C D19.C D20.C J?.1 J?.12 J?.14 J?.25 K1.4 K2.4 K3.4 K4.4 K5.4 K6.4 K7.4 K8.4 K9.4 K10.4 K11.4 K12.4 K13.4 K14.4 K15.4 K16.4 K17.4 K18.4 K19.4 K20.4 P1.2 P2.2 | length 730.7
  Bottom Layer w1: 14.097,92.456 27.344,92.456 30.011,95.123 K15.4 36.112,97.423 41.877,97.423 44.877,94.423 K20.4@51.233,94.423 ; 15.95,19.176 K5.4 16.274,27.4 16.974,28.1 23.353,28.1 25.65,25.803 26.353,25.1 32.615,25.1 33.423,25.908 35.687,25.908 ; D5.C 17.422,18.034 19.402,20.014 23.517,20.014 26.132,17.399 D10.C ; v2(17.145,64.008) 17.551,64.008 20.218,66.675 76.39,66.675 79.057,64.009 79.057,63.437 J?.25 J?.12 ; K10.4 35.786,27.17 35.786,26.322 35.687,26.223 35.687,25.908 ; D20.C 48.372,91.567 48.652,91.847 48.652,92.232 50.843,94.423 ; K20.4@51.264,94.392 K20.4 ; K20.4@51.964,95.154 54.233,97.423 60.874,97.423 63.874,94.423 70.045,94.423 73.045,97.423 80.2,97.423 83.2,94.423 89.371,94.423 92.371,97.423 99.345,97.423 102.345,94.423 108.395,94.423 111.395,97.423 117.444,97.423 120.444,94.423 123.759,94.423 126.77,97.434 127.635,97.434 ; D4.C 56.847,30.734 56.261,30.148 56.261,28.555 56.184,28.478 56.184,27.63 K4.4 ; D14.C 67.825,91.554 69.211,91.554 71.047,93.39 71.047,94.893 K14.4 ; D9.C 78.643,30.454 77.627,30.454 75.702,28.53 75.702,27.63 K9.4 75.473,27.27 76.618,26.125 ; D19.C 88.55,91.567 90.374,93.39 90.374,94.893 K19.4 ; D3.C 98.582,30.454 97.256,30.454 95.641,28.839 95.641,27.63 K3.4 95.412,27.143 96.493,26.062 ; D13.C 106.294,91.847 107.691,91.847 109.234,93.39 109.234,94.893 K13.4 ; D8.C 115.702,30.734 115.116,30.148 115.116,27.594 K8.4 115.094,27.4 116.218,26.276 ; D18.C@124.161,91.709 126.201,91.709 127.498,93.005 127.498,94.893 K18.4 127.635,95.215 127.635,97.434 ; D2.C@137.229,30.966 136.718,30.454 136.087,30.454 134.162,28.53 134.162,27.63 K2.4 133.933,27.357 135.121,26.169 ; D12.C 143.331,91.847 143.917,91.847 146.271,94.201 146.271,94.893 K12.4 146.501,97.377 146.558,97.434 ; D7.C 156.525,30.734 156.398,30.607 156.048,30.607 155.895,30.454 155.895,30.185 K7.4 153.11,25.268 153.289,25.089 ; D17.C 162.889,90.17 165.725,93.005 165.725,94.893 K17.4 165.725,95.353 165.725,97.318 165.608,97.434 ; D1.C 175.507,30.454 174.98,30.454 172.15,27.624 K1.4 172.15,25.154 172.085,25.089 ; D11.C@179.955,91.44 182.357,91.44 184.204,93.287 184.204,94.893 K11.4 ; D6.C@195.334,29.457 195.061,29.184 194.919,29.184 193.365,27.63 192.201,27.63 K6.4 189.672,25.1 182.553,25.1 179.553,28.1 176.119,28.1 173.107,25.089 172.085,25.089 ; K16.4 199.985,95.123 199.285,94.423 196.022,94.423 193.022,97.423 186.734,97.423 K11.4 ; 35.687,25.908 38.705,25.908 40.897,28.1 43.419,28.1 46.43,25.089 55.369,25.089 55.955,25.675 K4.4 ; K4.4 60.136,27.4 60.836,28.1 63.073,28.1 63.106,28.067 63.391,28.067 66.358,25.1 75.593,25.1 76.618,26.125 ; 76.618,26.125 78.593,28.1 82.876,28.1 85.876,25.1 95.532,25.1 96.493,26.062 ; 96.493,26.062 98.532,28.1 102.815,28.1 105.815,25.1 115.043,25.1 116.218,26.276 ; 116.218,26.276 118.043,28.1 122.326,28.1 125.326,25.1 134.053,25.1 135.121,26.169 ; 127.635,97.434 136.086,97.434 139.098,94.423 142.532,94.423 145.543,97.434 146.558,97.434 ; 135.121,26.169 137.053,28.1 141.336,28.1 144.347,25.089 153.289,25.089 ; 146.558,97.434 155.54,97.434 158.551,94.423 161.986,94.423 164.997,97.434 165.608,97.434 ; 153.289,25.089 154.067,25.089 157.078,28.1 160.513,28.1 163.524,25.089 172.085,25.089 ; 165.608,97.434 174.019,97.434 177.031,94.423 180.362,94.423 181.062,95.123 K11.4
  Bottom Layer w2: D15.C@14.097,95.03 14.097,92.456 14.097,65.884 15.425,64.556 15.425,63.442 P2.2@15.621,63.246 ; P2.2@16.256,63.246 16.256,56.769 7.366,47.879 7.366,27.705 D5.C ; J?.1 107.442,60.96 107.442,62.992 107.95,63.5 P1.2@114.427,63.5 ; D16.C 203.318,96.129 203.318,95.161 K16.4
  other v2: 116.078,63.5
AC: K1.5 K2.5 K3.5 K4.5 K5.5 K6.5 K7.5 K8.5 K9.5 K10.5 K11.5 K12.5 K13.5 K14.5 K15.5 K16.5 K17.5 K18.5 K19.5 K20.5 P3.2 | length 412.4
  Bottom Layer w3: K5.5 25.587,21.763 42.016,21.763 ; K15.5@28.002,96.932 28.002,99.335 29.759,101.092 45.995,101.092 65.277,101.092 84.603,101.092 103.464,101.092 ; K10.5 42.016,21.763 ; K20.5 45.995,100.986 46.101,101.092 ; K4.5 61.955,21.784 61.976,21.763 ; K14.5 65.277,100.964 65.405,101.092 ; 81.473,23.241 K9.5 ; K19.5 84.603,100.859 84.836,101.092 ; 101.412,23.241 K3.5 ; K13.5 103.464,101.092 ; 120.65,21.763 61.976,21.763 ; K8.5 120.923,21.763 139.933,21.763 ; 121.539,101.092 121.727,100.904 K18.5 ; K2.5 139.933,21.763 ; K12.5 140.501,101.092 ; 159.11,21.844 178.15,21.844 ; K7.5 159.11,21.763 139.933,21.763 ; K17.5 159.954,101.092 ; K1.5 178.15,21.844 ; K11.5 178.434,99.872 179.654,101.092 ; K16.5 193.388,101.092 179.654,101.092 ; K6.5 197.972,23.855 195.96,21.844 178.15,21.844 ; 42.016,21.763 61.976,21.763 ; 103.464,101.092 121.727,101.092 140.501,101.092 ; 140.501,101.092 159.954,101.092 ; 159.954,101.092 178.434,101.092 179.654,101.092
  other v2: 31.623,60.325
BUZZER: K1.3 K2.3 K3.3 K4.3 K5.3 K6.3 K7.3 K8.3 K9.3 K10.3 K11.3 K12.3 K13.3 K14.3 K15.3 K16.3 K17.3 K18.3 K19.3 K20.3 P4.1 P4.@29.654,55.372 | length 412
  Bottom Layer w3: K5.3 15.95,41.677 17.707,43.434 55.955,43.434 ; K15.3 33.812,81.885 36.174,79.523 51.995,79.523 ; K10.3 36.016,43.382 36.068,43.434 ; K20.3 51.995,79.523 ; K4.3 55.955,43.434 ; K14.3 71.374,82.726 71.374,79.523 ; K9.3 75.473,42.834 76.073,43.434 ; K19.3 90.678,82.748 90.678,79.523 ; K3.3 95.412,43.272 95.25,43.434 ; K13.3 109.464,79.787 109.728,79.523 90.678,79.523 ; 109.636,79.615 114.268,79.615 114.36,79.523 117.094,79.523 117.186,79.615 127.727,79.615 ; K8.3 114.923,42.279 116.078,43.434 ; K18.3 127.727,79.615 ; K2.3 133.933,42.47 132.969,43.434 ; K12.3 146.501,79.58 146.558,79.523 ; K7.3 153.11,43.105 152.781,43.434 ; K17.3 165.954,79.812 166.243,79.523 ; K1.3 172.15,42.864 172.72,43.434 ; 172.15,43.434 152.781,43.434 ; 172.286,43 189.759,43 191.972,40.788 K6.3 ; K11.3 184.434,79.747 184.658,79.523 ; K16.3 200.057,79.523 184.658,79.523 ; 51.995,79.523 71.374,79.523 ; 55.955,43.434 95.25,43.434 ; 71.374,79.523 90.678,79.523 ; 95.25,43.434 116.078,43.434 ; 116.078,43.434 132.969,43.434 ; 127.727,79.615 127.635,79.523 146.558,79.523 ; 132.969,43.434 152.781,43.434 ; 146.558,79.523 166.243,79.523 ; 166.243,79.523 184.658,79.523
  other v2: 31.623,55.372
GND: J1.1 J2.1 J3.1 J4.1 J5.1 J6.1 J7.1 J8.1 J9.1 J10.1 J11.1 J12.1 J13.1 J14.1 J15.1 J16.1 J17.1 J18.1 J19.1 J20.1 P1.1 P2.1 Q1.3 Q2.3 Q3.3 Q4.3 Q5.3 Q6.3 Q7.3 Q8.3 Q9.3 Q10.3 Q11.3 Q12.3 Q13.3 Q14.3 Q15.3 Q16.3 Q17.3 Q18.3 Q19.3 Q20.3 | length 552.2
  Bottom Layer w2: P2.1@12.725,63.246 12.065,62.586 12.065,57.404 4.572,49.911 4.572,26.289 14.172,16.689 14.172,16.55 16.129,14.593 16.129,4.699 17.399,3.429 26.035,3.429 ; P2.1@12.725,63.437 11.124,65.039 11.124,104.169 12.746,105.791 ; Q15.3 12.746,105.791 ; J5.1 25.968,6.131 25.968,3.496 26.035,3.429 ; J20.1 42.077,118.023 42.164,118.11 ; J10.1 45.834,6.131 45.834,4.053 45.212,3.431 ; J14.1 61.258,115.035 61.258,117.558 60.706,118.11 ; J4.1 65.873,3.431 ; Q4.3@70.358,4.445 Q4.3 ; J19.1 80.785,115.035 80.785,117.996 80.899,118.11 ; J9.1 85.471,6.151 85.471,3.556 ; Q9.3@90.043,4.572 Q9.3 ; J13.1 99.445,115.035 99.445,117.725 99.06,118.11 ; J3.1 105.381,6.181 105.381,3.839 105.618,3.602 ; J18.1 117.809,117.936 117.983,118.11 ; 124.841,3.556 J8.1 ; J12.1 136.582,118.04 136.652,118.11 ; J2.1 143.891,6.191 143.891,3.556 ; J17.1 156.21,115.109 156.21,118.11 ; 163.028,3.858 J7.1 ; J11.1 174.415,115.035 174.415,117.685 173.99,118.11 ; J1.1 183.054,3.431 ; J16.1 190.263,118.11 173.99,118.11 ; Q6.3@204.089,14.732 204.089,8.557 201.79,6.258 201.79,4.603 200.618,3.431 187.833,3.431 183.054,3.431 ; 12.746,105.791 25.065,118.11 42.164,118.11 ; 26.035,3.429 32.893,3.429 32.895,3.431 45.212,3.431 ; 42.164,118.11 60.706,118.11 ; 45.212,3.431 65.873,3.431 ; 60.706,118.11 80.899,118.11 ; 65.873,3.431 85.471,3.431 90.043,3.431 105.33,3.431 109.982,3.431 143.891,3.431 148.59,3.431 163.028,3.431 167.767,3.431 183.054,3.431 ; 80.899,118.11 99.06,118.11 ; 99.06,118.11 117.983,118.11 ; 117.983,118.11 136.652,118.11 ; 136.652,118.11 156.21,118.11 ; 156.21,118.11 173.99,118.11
  other v2: 116.459,59.309 10.414,63.373
NetJ1_2: J1.2 R1.2 | length 8.8
  Bottom Layer w1: R1.2@177.884,14.986 177.884,14.886 178.054,14.716 J1.2
NetJ2_2: J2.2 R2.2 | length 8.8
  Bottom Layer w1: R2.2@138.768,14.986 138.81,14.945 138.81,6.273 J2.2
NetJ3_2: J3.2 R3.2 | length 8.8
  Bottom Layer w1: R3.2@100.16,14.859 R3.2@100.182,14.838 ; R3.2@100.309,14.965 100.309,6.253 J3.2
NetJ4_2: J4.2 R4.2 | length 8.8
  Bottom Layer w1: R4.2@60.79,14.986 60.832,14.945 60.832,6.273 J4.2
NetJ5_2: J5.2 R5.2 | length 9
  Bottom Layer w0.7: R5.2@20.404,14.986 R5.2@20.617,14.773 ; R5.2 R5.2@20.617,14.773 ; J5.2 20.868,14.508 20.617,14.759 R5.2@20.617,14.773
NetJ6_2: J6.2 R6.2 | length 8.3
  Bottom Layer w1: R6.2@196.426,15.013 R6.2@196.426,15.113 ; J6.2 R6.2@196.89,14.549
NetJ7_2: J7.2 R7.2 | length 8.8
  Bottom Layer w1: R7.2@157.902,15.24 R7.2@157.944,15.199 ; R7.2@157.987,14.945 157.987,6.273 J7.2
NetJ8_2: J8.2 R8.2 | length 8.8
  Bottom Layer w1: J8.2 119.843,6.233 119.843,14.984 R8.2@119.845,14.986
NetJ9_2: J9.2 R9.2 | length 8.6
  Bottom Layer w1: R9.2@80.348,14.859 80.369,14.837 80.369,6.253 J9.2
NetJ10_2: J10.2 R10.2 | length 8.7
  Bottom Layer w1: R10.2@40.871,14.351 40.871,6.294 J10.2 ; R10.2@40.871,14.478 R10.2@40.871,15.05
NetJ11_2: J11.2 R11.2 | length 10
  Bottom Layer w1: J11.2 179.589,114.862 179.589,105.102 R11.2
NetJ12_2: J12.2 R12.2 | length 10.1
  Bottom Layer w1: R12.2 141.408,105.002 141.408,114.761 J12.2
NetJ13_2: J13.2 R13.2 | length 9
  Bottom Layer w1: J13.2 104.575,114.905 104.575,105.948 R13.2
NetJ14_2: J14.2 R14.2 | length 10.2
  Bottom Layer w1: J14.2 66.368,114.925 66.368,104.785 R14.2
NetJ15_2: J15.2 R15.2 | length 8
  Bottom Layer w1: J15.2 28.893,106.934 R15.2@28.916,106.911
NetJ16_2: J16.2 R16.2 | length 10.7
  Bottom Layer w1: J16.2 201.295,112.078 R16.2
NetJ17_2: J17.2 R17.2 | length 9.9
  Bottom Layer w1: J17.2 161.036,114.678 161.374,114.34 R17.2
NetJ18_2: J18.2 R18.2 | length 9.4
  Bottom Layer w1: R18.2 122.788,105.558 122.788,114.913 J18.2
NetJ19_2: J19.2 R19.2 | length 9.9
  Bottom Layer w1: R19.2 85.528,105.256 85.528,105.785 85.685,105.942 J19.2
NetJ20_2: J20.2 R20.2 | length 8.9
  Bottom Layer w1: J20.2 47.077,114.737 47.328,114.486 R20.2@47.328,106.272
NetP3_1: P3.1 P4.2 | length 5
  Bottom Layer w2: P4.2@25.463,55.372 25.463,60.198 P3.1@25.59,60.325
  other v2: 24.13,55.245 24.132,60.058
NetQ1_2: Q1.2 R1.1 | length 11.1
  Bottom Layer w1: R1.1 180.313,14.759 180.313,14.188 187.07,7.43 187.642,7.43 Q1.2
NetQ2_2: Q2.2 R2.1 | length 11.9
  Bottom Layer w1: R2.1 141.181,12.659 143.795,10.045 143.935,10.045 146.549,7.43 148.399,7.43 Q2.2
NetQ3_2: Q3.2 R3.1 | length 11
  Bottom Layer w1: R3.1 102.8,14.759 102.8,13.85 109.219,7.43 109.791,7.43 Q3.2
NetQ4_2: Q4.2 R4.1 | length 11.8
  Bottom Layer w1: R4.1 63.176,14.886 63.176,13.024 68.77,7.43 70.421,7.43 Q4.2
NetQ5_2: Q5.2 R5.1 | length 11.6
  Bottom Layer w1: R5.1 22.917,14.759 22.917,13.659 29.146,7.43 30.416,7.43 Q5.2
NetQ6_2: Q6.2 R6.1 | length 7.3
  Bottom Layer w1: R6.1 201.803,17.78 Q6.2@204.999,17.78
NetQ7_2: Q7.2 R7.1 | length 11.1
  Bottom Layer w1: R7.1 160.331,14.759 160.331,14.104 167.004,7.43 167.576,7.43 Q7.2
NetQ8_2: Q8.2 R8.1 | length 11.1
  Bottom Layer w1: R8.1 122.231,14.759 122.231,14.104 128.904,7.43 129.476,7.43 Q8.2
NetQ9_2: Q9.2 R9.1 | length 10.9
  Bottom Layer w1: R9.1 82.607,14.759 82.607,14.231 89.28,7.557 89.852,7.557 Q9.2
NetQ10_2: Q10.2 R10.1 | length 11.4
  Bottom Layer w1: R10.1 43.137,14.505 43.237,14.405 44.142,14.405 48.346,10.201 48.346,8.741 49.783,7.303 50.355,7.303 Q10.2
NetQ11_2: Q11.2 R11.1 | length 12.5
  Bottom Layer w1: Q11.2 170.371,113.982 170.943,113.982 177.462,107.462 R11.1
NetQ12_2: Q12.2 R12.1 | length 12.4
  Bottom Layer w1: Q12.2 132.525,113.982 133.097,113.982 139.108,107.97 R12.1
NetQ13_2: Q13.2 R13.1 | length 11.6
  Bottom Layer w1: Q13.2 95.314,113.982 95.886,113.982 102.305,107.562 102.305,106.018 R13.1
NetQ14_2: Q14.2 R14.1 | length 12.8
  Bottom Layer w1: Q14.2 57.341,114.109 57.913,114.109 64.178,107.843 R14.1
NetQ15_2: Q15.2 R15.1 | length 8.6
  Bottom Layer w1: Q15.2 20.663,105.88 20.663,107.237 21.417,107.991 25.486,107.991 R15.1@26.863,106.614
NetQ16_2: Q16.2 R16.1 | length 13.7
  Bottom Layer w1: Q16.2 189.294,113.982 190.495,113.982 191.841,112.635 191.97,112.635 199.095,105.51 R16.1
NetQ17_2: Q17.2 R17.1 | length 12.4
  Bottom Layer w1: Q17.2 151.321,113.728 151.893,113.728 159.074,106.546 159.074,105.256 R17.1
NetQ18_2: Q18.2 R18.1 | length 11.9
  Bottom Layer w1: Q18.2 113.602,113.982 114.174,113.982 120.566,107.589 R18.1
NetQ19_2: Q19.2 R19.1 | length 12
  Bottom Layer w1: Q19.2 76.391,113.728 76.963,113.728 83.228,107.462 R19.1
NetQ20_2: Q20.2 R20.1 | length 11.7
  Bottom Layer w0.7: Q20.2 38.198,114.681 38.688,114.191 38.695,114.191 44.964,107.922 44.964,106.336 R20.1
pads on no net: J?.13 J?.26 K1.2 K2.2 K3.2 K4.2 K5.2 K6.2 K7.2 K8.2 K9.2 K10.2 K11.2 K12.2 K13.2 K14.2 K15.2 K16.2 K17.2 K18.2 K19.2 K20.2 P4.@28.994,55.372

## Polygon pours and split planes (outlines as drawn)
BUZZER on Bottom Layer "BUZZER_L02_P000" (solid, remove dead copper, pour order 0): 33.528,43.942 33.528,38.735 30.099,38.735 29.972,38.862 29.972,43.942

## Other copper
Bottom Layer:
  text "M.M.KHALIGH" at 122.936,59.623 h5

## Text inside footprints (layer, text, board x,y; h text height)
J1: Mechanical 13 "NAME" at 185.641,1.144 h1.27 r180; Mechanical 13 "VALUE" at 185.647,12.597 h1.27 r180
J2: Mechanical 13 "VALUE" at 146.444,12.597 h1.27 r180; Mechanical 13 "NAME" at 146.438,1.144 h1.27 r180
J3: Mechanical 13 "NAME" at 107.917,1.144 h1.27 r180; Mechanical 13 "VALUE" at 107.923,12.597 h1.27 r180
J4: Mechanical 13 "NAME" at 68.46,1.144 h1.27 r180; Mechanical 13 "VALUE" at 68.466,12.597 h1.27 r180
J5: Mechanical 13 "VALUE" at 28.461,12.597 h1.27 r180; Mechanical 13 "NAME" at 28.455,1.144 h1.27 r180
J6: Mechanical 13 "VALUE" at 204.483,12.724 h1.27 r180; Mechanical 13 "NAME" at 204.477,1.271 h1.27 r180
J7: Mechanical 13 "NAME" at 165.615,1.144 h1.27 r180; Mechanical 13 "VALUE" at 165.621,12.597 h1.27 r180
J8: Mechanical 13 "NAME" at 127.428,1.144 h1.27 r180; Mechanical 13 "VALUE" at 127.434,12.597 h1.27 r180
J9: Mechanical 13 "NAME" at 87.978,1.144 h1.27 r180; Mechanical 13 "VALUE" at 87.984,12.597 h1.27 r180
J10: Mechanical 13 "NAME" at 48.521,1.144 h1.27 r180; Mechanical 13 "VALUE" at 48.527,12.597 h1.27 r180
J11: Mechanical 13 "VALUE" at 171.922,108.569 h1.27; Mechanical 13 "NAME" at 171.928,120.022 h1.27
J12: Mechanical 13 "NAME" at 133.995,120.022 h1.27; Mechanical 13 "VALUE" at 133.989,108.569 h1.27
J13: Mechanical 13 "NAME" at 96.958,120.022 h1.27; Mechanical 13 "VALUE" at 96.953,108.569 h1.27
J14: Mechanical 13 "VALUE" at 58.765,108.569 h1.27; Mechanical 13 "NAME" at 58.771,120.022 h1.27
J15: Mechanical 13 "VALUE" at 21.3,108.569 h1.27; Mechanical 13 "NAME" at 21.306,120.022 h1.27
J16: Mechanical 13 "VALUE" at 190.845,108.569 h1.27; Mechanical 13 "NAME" at 190.851,120.022 h1.27
J17: Mechanical 13 "NAME" at 153.449,120.022 h1.27; Mechanical 13 "VALUE" at 153.443,108.569 h1.27
J18: Mechanical 13 "VALUE" at 115.216,108.569 h1.27; Mechanical 13 "NAME" at 115.222,120.022 h1.27
J19: Mechanical 13 "NAME" at 78.098,120.022 h1.27; Mechanical 13 "VALUE" at 78.092,108.569 h1.27
J20: Mechanical 13 "NAME" at 39.49,120.149 h1.27; Mechanical 13 "VALUE" at 39.484,108.696 h1.27